# EAGLE board temp_room_module_wireless (EAGLE 6.4)
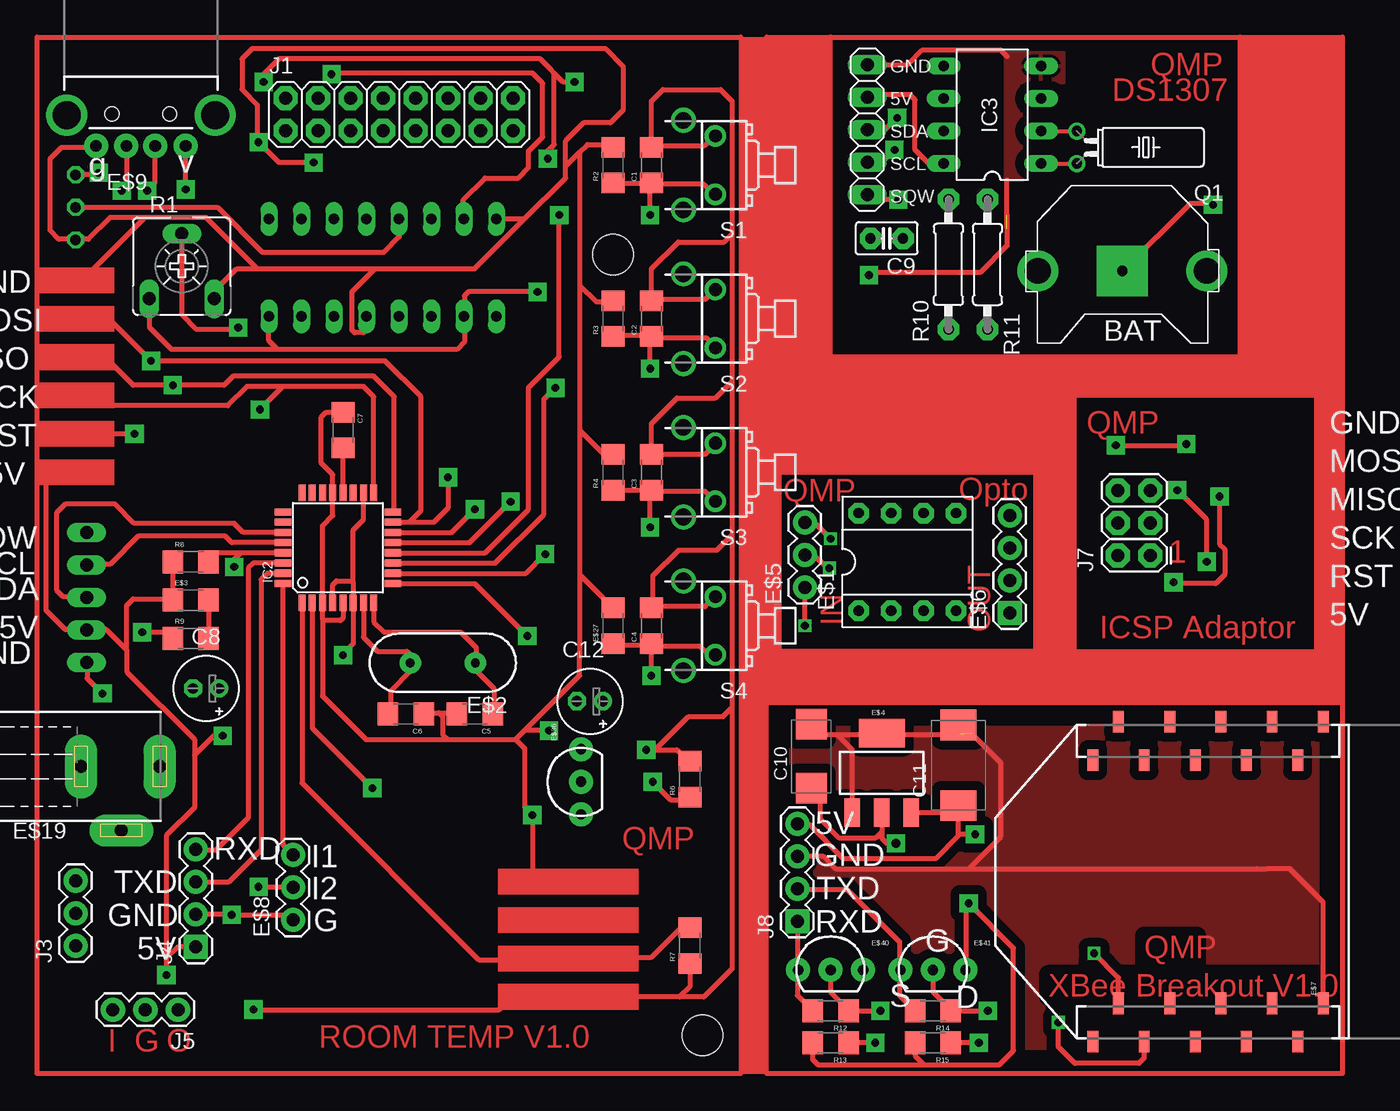
[diagram p0: board, top side]
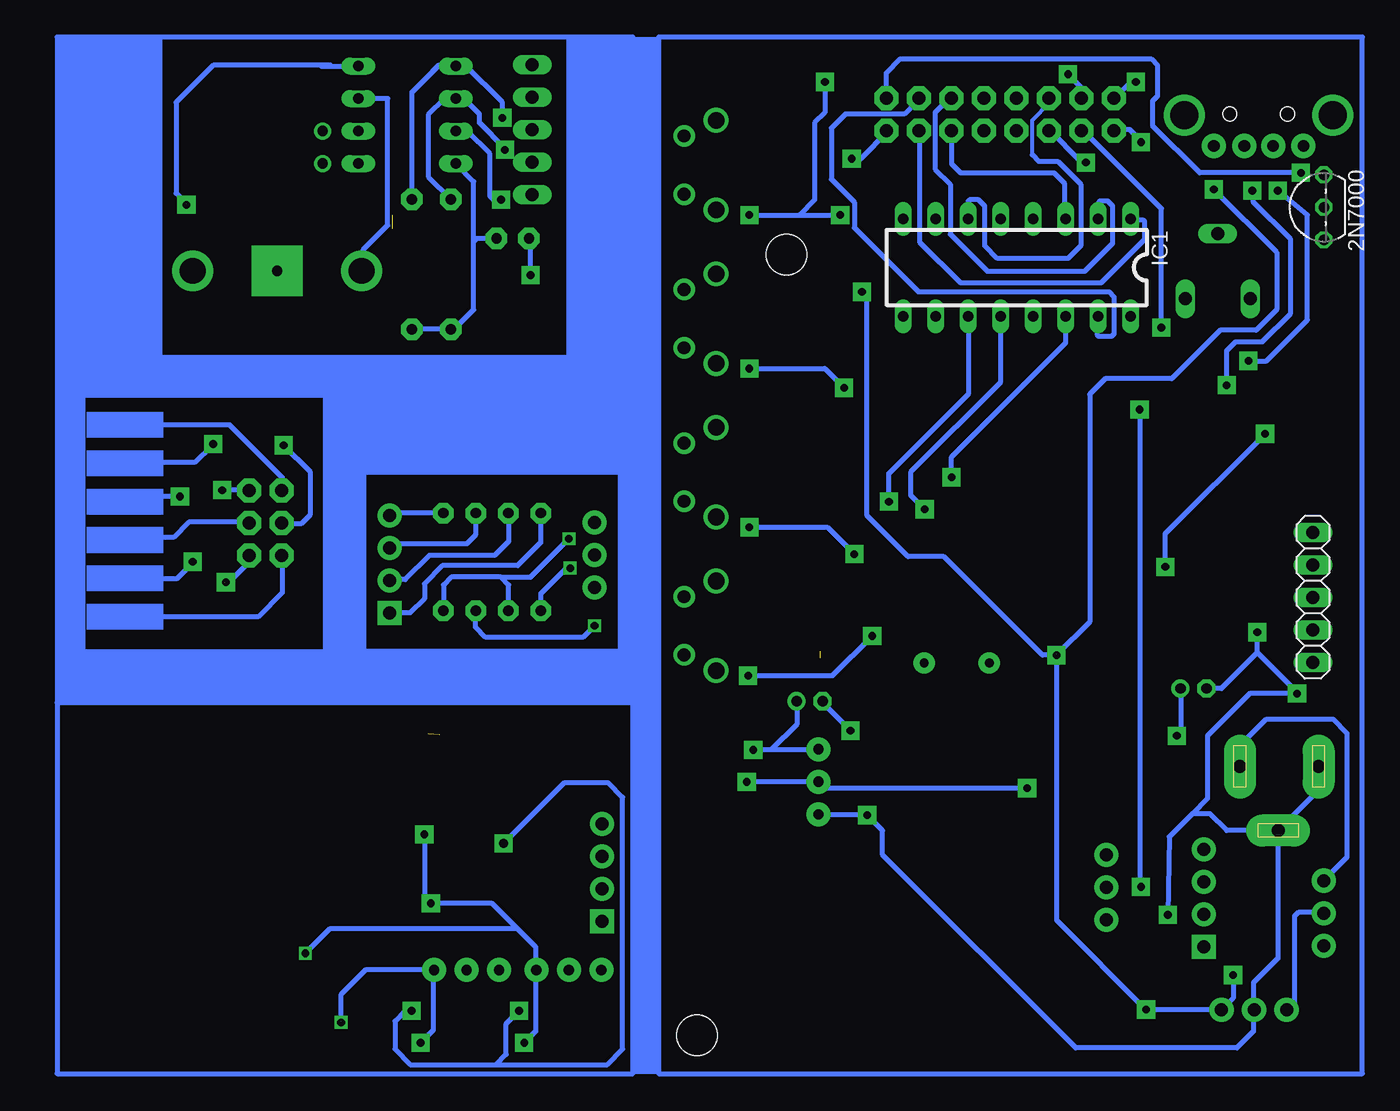
[diagram p1: board, bottom side, seen from below]

No outline drawn. Coordinates in mm, seen from the top.
Copper layers (1*16): Top 0.035mm / dielectric 1.5mm / Bottom 0.035mm
Design rules "default": minimum track width 10mil, minimum drill 24mil, track to track 28mil, track to pad 28mil, pad to pad 28mil, via to via 28mil, smd to smd 28mil, copper to edge 40mil, drill to drill 8mil, minimum pad ring 10mil, minimum via ring 8mil, stop-mask expansion 4mil, vias tented up to drill 0mil, thermal gap 10mil
Holes 3.2 mm at 45,64 52,3

## Footprints (pad centres in the part's own frame; a part is rotated, then mirrored left to right if it is on the bottom)
TO92- = drill 0.813 octagon: 1 -2.54,0; 2 0,0; 3 2.54,0
CR1220-THM = drill 2 pad 3.175: +1 -6.604,0; +2 6.604,0 | drill 0.8 pad 3.962 square: - 0,0
1206 = smd 1.6 x 1.8: 1 -1.4,0; 2 1.4,0
E2-5 = drill 0.813 pad 1.422: + -1.016,0 | drill 0.813 pad 1.422 octagon: - 1.016,0
C025-025X050 = drill 0.813 pad 1.676 octagon: 1 -1.27,0; 2 1.27,0
SMC_C = smd 2.4 x 2.4: + -2.5,0; - 2.5,0
SMC_D = smd 2.4 x 2.8: + -3.15,0; - 3.15,0
DIL08 = drill 0.813 pad 1.6 octagon: 1 -3.81,-3.81; 2 -1.27,-3.81; 3 1.27,-3.81; 4 3.81,-3.81; 5 3.81,3.81; 6 1.27,3.81; 7 -1.27,3.81; 8 -3.81,3.81
HC49US = drill 0.7 pad 1.651: 1 -2.54,0; 2 2.54,0
SOT223 = smd 1.219 x 2.235: 1 -2.311,-3.099; 2 0,-3.099; 3 2.311,-3.099 | smd 3.6 x 2.2: 4 0,3.099
1X03 = drill 1.016 pad 1.88: 1 0,0; 2 2.54,0; 3 5.08,0
1X04 = drill 1.016 pad 1.88 square: 1 0,0 | drill 1.016 pad 1.88: 2 2.54,0; 3 5.08,0; 4 7.62,0
XBEE-SMD = smd 1.7 x 0.85: 1 -12.5,20; 2 -9.5,18; 3 -12.5,16; 4 -9.5,14; 5 -12.5,12; 6 -9.5,10; 7 -12.5,8; 8 -9.5,6; 9 -12.5,4; 10 -9.5,2; 11 12.5,2; 12 9.5,4; 13 12.5,6; 14 9.5,8; 15 12.5,10; 16 9.5,12; 17 12.5,14; 18 9.5,16; 19 12.5,18; 20 9.5,20
USB-A-H = drill 0.914 pad 1.88: D+ 2.4,1.127; D- 2.4,-1.127; GND 2.4,3.5; VBUS 2.4,-3.5 | drill 2.2: GND2 0,-5.8; GND3 0,5.8 | hole 1.1: -0.1,2.25; -0.1,-2.25
733980-62 = drill 1 pad 2.5 long: 1 0,8.57; 2 0,2.42; 3 5,5.57
TO-92-AMMO = drill 0.813 pad 1.88: 1 -2.54,0; 2 0,0; 3 2.54,0
DIL16 = drill 0.813 long: 1 -8.89,-3.81; 2 -6.35,-3.81; 3 -3.81,-3.81; 4 -1.27,-3.81; 5 1.27,-3.81; 6 3.81,-3.81; 7 6.35,-3.81; 8 8.89,-3.81; 9 8.89,3.81; 10 6.35,3.81; 11 3.81,3.81; 12 1.27,3.81; 13 -1.27,3.81; 14 -3.81,3.81; 15 -6.35,3.81; 16 -8.89,3.81
TQFP32-08 = smd 1.27 x 0.559: 1 -4.293,2.8; 2 -4.293,2; 3 -4.293,1.2; 4 -4.293,0.4; 5 -4.293,-0.4; 6 -4.293,-1.2; 7 -4.293,-2; 8 -4.293,-2.8; 17 4.293,-2.8; 18 4.293,-2; 19 4.293,-1.2; 20 4.293,-0.4; 21 4.293,0.4; 22 4.293,1.2; 23 4.293,2; 24 4.293,2.8 | smd 0.559 x 1.27: 9 -2.8,-4.293; 10 -2,-4.293; 11 -1.2,-4.293; 12 -0.4,-4.293; 13 0.4,-4.293; 14 1.2,-4.293; 15 2,-4.293; 16 2.8,-4.293; 25 2.8,4.293; 26 2,4.293; 27 1.2,4.293; 28 0.4,4.293; 29 -0.4,4.293; 30 -1.2,4.293; 31 -2,4.293; 32 -2.8,4.293
DIL08' = drill 0.813 long: 1 -3.81,-3.81; 2 -1.27,-3.81; 3 1.27,-3.81; 4 3.81,-3.81; 5 3.81,3.81; 6 1.27,3.81; 7 -1.27,3.81; 8 -3.81,3.81
2X8 = drill 1.016 pad 1.88 octagon: 1 0,0; 2 0,2.54; 3 2.54,0; 4 2.54,2.54; 5 5.08,0; 6 5.08,2.54; 7 7.62,0; 8 7.62,2.54; 9 10.16,0; 10 10.16,2.54; 11 12.7,0; 12 12.7,2.54; 13 15.24,0; 14 15.24,2.54; 15 17.78,0; 16 17.78,2.54
1X05 = drill 1.016 long: 1 -5.08,0; 2 -2.54,0; 3 0,0; 4 2.54,0; 5 5.08,0
2X3 = drill 1.016 pad 1.88 octagon: 1 0,0; 2 0,2.54; 3 2.54,0; 4 2.54,2.54; 5 5.08,0; 6 5.08,2.54
TC38H = drill 0.813: 1 -1.27,0; 2 1.27,0
CA6V = drill 1.016 long: A -2.54,-2.54; E 2.54,-2.54; S 0,2.54
0207/10 = drill 0.813 pad 1.676 octagon: 1 -5.08,0; 2 5.08,0
TL1105JA = drill 1 pad 1.676: 1 -2.275,0; 2 2.275,0 | drill 1.3 pad 1.9: 3 -3.5,2.5; 4 3.5,2.5

## Placement (x,y rotation side)
2N7000  [TO92-]  3,67.7 90 bottom
BAT  CR1220  [CR1220-THM]  84.81,62.74 180 top
C1  0.1uF  [1206]  48,71 90 top
C2  0.1uF  [1206]  48,59 90 top
C3  0.1uF  [1206]  48,47 90 top
C4  0.1uF  [1206]  48,35 90 top
C5  22pF  [1206]  34.2,28.1 180 top
C6  22pF  [1206]  28.8,28.1 180 top
C7  0.1uF  [1206]  23.9,50.3 270 top
C8  [E2-5]  13.2,30.1 180 top
C9  0.1uF  [C025-025X050]  66.39,65.28 180 top
C10  [SMC_C]  60.5,24.8 90 top
C11  [SMC_D]  72,24.1 90 top
C12  [E2-5]  43.2,29.1 180 top
E$1  [DIL08]  68,40 0 top
E$2  [HC49US]  31.7,32.1 180 top
E$3  [1206]  12,37 0 top
E$4  [SOT223]  66,23.5 0 top
E$5  [1X03]  60,38 90 top
E$6  [1X04]  76,36 90 top
E$7  [XBEE-SMD]  102.5,15 90 top
E$8  [1X03]  20,12 90 top
E$9  [USB-A-H]  8.1,74.9 270 top
E$19  [733980-62]  1,24 270 top
E$27  [1206]  45,35 90 top
E$36  [TO-92-AMMO]  42.5,22.8 90 top
E$40  [TO-92-AMMO]  62,8.1 0 top
E$41  [TO-92-AMMO]  70,8.1 0 top
IC1  [DIL16]  27,63 180 bottom
IC2  [TQFP32-08]  23.5,41.1 90 top
IC3  DS1307  [DIL08']  74.64,74.93 90 top
J1  [2X8]  19.4,73.7 0 top
J2  [1X05]  3.87,37.21 270 bottom
J3  [1X03]  3,10 90 top
J4  [1X04]  12.4,9.9 90 top
J5  [1X03]  11,5 180 top
J6  [1X05]  64.87,73.79 90 top
J7  ICSP  [2X3]  87,40.5 90 top
J8  [1X04]  59.4,11.9 90 top
Q1  32.768  [TC38H]  81.25,72.39 270 top
R1  10K  [CA6V]  11.3,63.1 0 top
R2  10K  [1206]  45,71 90 top
R3  10K  [1206]  45,59 90 top
R4  10K  [1206]  45,47 90 top
R6  4.7K  [1206]  51,23 90 top
R7  10K  [1206]  51,10 90 top
R8  10K  [1206]  12,40 0 top
R9  330  [1206]  12,34 0 top
R10  2.2K  [0207/10]  71.22,63.25 90 top
R11  2.2k  [0207/10]  74.26,63.25 270 top
R12  10K  [1206]  62,4.9 180 top
R13  10K  [1206]  62,2.4 180 top
R14  10K  [1206]  70,4.9 180 top
R15  10K  [1206]  70,2.4 180 top
S1  [TL1105JA]  53,71 90 top
S2  [TL1105JA]  53,59 90 top
S3  [TL1105JA]  53,47 90 top
S4  [TL1105JA]  53,35 90 top

## Library data of the parts
2N7000 = maxim
BAT C8 C9 C12 IC3 R10 R11 = adafruit
C1-C7 E$1-E$9 E$27 E$36 E$40 E$41 IC1 J1 J3-J5 J7 J8 R2-R4 R6-R9 R12-R15 = SparkFun
C10 C11 = rcl
E$19 = con-conrad
IC2 = atmel
J2 J6 = pinhead
Q1 = crystal
R1 = pot
S1-S4 = switch

## Nets
GND: R4.2
GND1: IC3.4 J6.5
N$14: IC3.1 Q1.2
N$15: IC3.2 Q1.1
N$39: BAT.+2 IC3.3
S$2: C1.1 R2.1
S$8: C3.1
S$11: C3.2 C4.2
S$34: E$3.2
S$40: J7.1
S$44: J8.1
S$47: E$5.1
S$48: E$40.2 E$41.2
S$50: E$6.1
S$53: J4.1 J5.1
S$62: E$7.2 R13.2 R15.2
S$66: R4.1
S$69: C4.1
S$77: 2N7000.2
S$81: E$36.2
S$94: C7.1
SCL: IC3.6 R10.2
SDA: R11.1
SQW: IC3.7
VCC: C9.1 IC3.8 R10.1 R11.2

## Tracks (layer width: path | path; a pad name or v marks a point on that pad's centre or on a via)
GND  (via drill 0.6 pad 1.42)  (1 unrouted)
  Top 0.406: 42.4,72 42.4,61.6 | 42.4,61.6 42.4,50.3 | 42.4,50.3 42.4,39 | 42.4,39 44.7,36.7 | 45,60.3 43.7,60.3 42.4,61.6 | R4.2 44.3,48.4 42.4,50.3 | 42.4,72 43,72.6 45,72.6 | 42.4,39 42.4,32.5 | 25.8,59.2 25.8,58.2 25.5,57.9 24.8,57.9 24.6,58.1 24.6,61.1 26.4,62.9 | 13.8,60.5 13.8,61.1 15.6,62.9 17.2,62.9 | 17.2,62.9 26.4,62.9 | 26.4,62.9 34.2,62.9 38.1,66.8 | 17.2,62.9 13.2,66.9 8.4,66.9 | 8.4,66.9 5.7,66.9 4,65.2 1.7,65.2 1,65.9 1,71.5 1.9,72.4 4.4,72.4 4.5,72.5 | 36,66.8 38.1,66.8 | 38.1,66.8 41.3,70 41.3,70.9 | 41.3,70.9 41.3,72.9 42.7,74.3 44.8,74.3 45.8,75.3 45.8,78.7 44.4,80.1 16.8,80.1 16,79.3 16,76.9 17.2,75.7 17.2,72.9 v17.3,72.8 18.9,71.2 v21.6,71.2 | 42.4,72 41.3,70.9 | 8.4,66.9 4,62.5 | 23.9,36.8 23.9,35.6 23.7,35.4 22.4,35.4 22.3,35.5 | 22.3,35.5 22.3,36.8 | 22.3,35.5 22.3,29.5 25.7,26.1 32.1,26.1 | 30.2,28.2 31.4,28.2 | 31.4,28.2 32.8,28.2 | 31.4,28.2 31.7,27.9 31.7,26.5 32.1,26.1 | 37.4,26.1 38.1,26.8 | 38.1,26.8 42.4,31.1 42.4,33 | 32.1,26.1 37.4,26.1 | 37.4,26.1 38.1,25.4 38.1,20.8 v38.7,20.2 38.7,15.1 | v40,26.8 38.1,26.8 | 19.9,12 19.5,12.4 v15.2,12.4 15.1,12.5 12.4,12.5 | v8.2,34.5 10.1,34.5 | 3.9,32.1 3.9,30.9 v5.1,29.7
  Bottom 0.406: 42.2,29.1 42.2,29 v40,26.8 | 42.5,20.3 42.4,20.2 v38.7,20.2 37.5,19 37.5,17.1 22.4,2 9.8,2 8.5,3.3 8.5,7.1 6.6,9 6.6,19 10.6,19 11.9,20.3 13.3,20.3 | v21.6,71.2 21.9,71.2 24.5,73.8 | 13.3,20.3 14.2,19.4 15.1,18.5 v15.2,12.4 | 12.2,30.1 11,30.1 8.2,32.9 | 8.2,32.9 v8.2,34.5 | 8.2,32.9 5.1,29.8 v5.1,29.7 8.8,29.7 12.1,26.4 12.1,21.5 13.3,20.3
GND1  (via drill 0.6 pad 1.42)  (1 unrouted)
  Top 0.406: IC3.4 78.33,78.74 | J6.5 68.04,78.87 69.18,80.01 75.28,80.01 75.79,79.5 | 75.79,66.04 75.79,69.85 | 75.8,67.1 75.8,64.7 73.7,62.6 65.2,62.6 v65,62.4
  Bottom 0.406: 81.38,78.74 IC3.4 | v65,62.4 65,65.2 65.1,65.3
  pour Top: 75.66,79.76 75.66,69.85 91.92,69.85 91.92,74.93 76.68,74.93 76.68,77.47 80.23,77.47 80.23,79.76
GND3  (1 unrouted)
  Top 0.406: 59.4,17 61.4,17 62.4,16 72.8,16 | 72.8,16 75.3,18.5 75.3,24.3 73,26.6 | 72.8,16 95.3,16 96.1,16 97.9,16 100.5,13.4 100.5,5.7 | 60.4,26.5 62.5,26.5 | 62.5,26.5 72.1,26.5 | 63.7,20.6 63.7,25.3 62.5,26.5
  pour Top: 59,27 100,27 100,2 59,2
N$14
  Top 0.305: IC3.1 78.71,71.12 arc-90 78.84,70.99 arc-90 78.96,71.12 Q1.2
N$15
  Top 0.305: IC3.2 Q1.1
N$39
  Bottom 0.406: IC3.3 76.17,76.2 76.17,66.29 78.07,64.39 78.07,62.74 BAT.+2
S$1
  Bottom 0.406: 55,81 55,0 0,0 0,81 55,81
S$2
  Top 0.406: 45,69.5 R2.1 C1.1
S$3
  Bottom 0.406: 94,56 62,56 62,81 94,81 94,56
S$4
  Top 0.406: 100,53 81,53 81,33 100,33 100,53
S$5  (via drill 0.6 pad 1.42)
  Top 0.406: 27.9,43.1 29.1,43.1 | 29.1,43.1 31,43.1 32.1,44.2 v32.1,46.6 | 29.1,43.1 30,44 30,52.9 27.2,55.7 v8.9,55.7 5.4,59.2 | 7,72.5 7,69.4 v6.6,69
  Bottom 0.406: 23.2,59.2 23.2,57.1 32.1,48.2 v32.1,46.6 | v8.9,55.7 7.5,55.7 4.3,58.9 4.3,67.1 v6.6,69
S$6
  Top 0.406: 53,32.7 52.5,32.7 51.8,33.4 48.2,33.4
S$7
  Bottom 0.406: 32.1,73.7 32.1,71.1 31.4,70.4 24.1,70.4 23.3,69.6 23.3,66.9 23.2,66.8
S$8
  Top 0.406: 53,44.7 52.2,45.5 48.1,45.5 C3.1
S$9
  Top 0.406: 53,49.3 53,49.2 52.2,48.4 48.2,48.4
S$10
  Top 0.406: 53,56.7 53,56.8 52.3,57.5 48.2,57.5
S$11
  Top 0.406: 47.5,25.3 48.3,25.3 50.9,27.9 53.6,27.9 54.3,28.6 | 53,61.3 52.2,60.5 48,60.5 48,62.9 50.1,65 53.7,65 54.3,65.6 | C3.2 48,50.8 50,52.8 53,52.8 54.3,54.1 | 53,73.3 52.9,73.3 52.1,72.5 48,72.5 48,76 48.9,76.9 53.4,76.9 54.3,76 54.3,65.6 | 54.3,65.6 54.3,54.1 | 54.3,54.1 54.3,42.1 | 54.3,42.1 53.1,40.9 50.1,40.9 48.1,38.9 48.1,36.5 | 53,37.3 52.2,36.5 48.1,36.5 | 48.1,36.5 C4.2 | 54.3,42.1 54.3,28.6 | 54.3,28.6 54.3,8.2 52.1,6 50.2,6 | 50.2,6 45.9,6 | 51,8.5 51,6.8 50.2,6
S$12
  Top 0.406: 53,68.7 52.9,68.7 52.1,69.5 47.9,69.5
S$13
  Bottom 0.305: 25.8,71.8 25.8,74.5 24.4,75.9
  Bottom 0.406: 24.4,76.3 24.4,75.9 | 25.8,71.8 25.3,71.3 23.8,71.3 22,69.5 22,64.7 23,63.7 28.5,63.7 29.5,64.7 29.5,67.8 30,68.3 30.7,68.3 30.8,68.2 30.8,66.8
S$14
  Bottom 0.406: 57,29 57,0 102,0 102,29 | 102,29 57,29 | 57,29 57,81 102,81 102,29
S$15
  Bottom 0.406: 3,12.6 5,12.6 5.3,12.3 5.3,5.6 5.9,5
S$17
  Bottom 0.406: 84.4,45.5 84.4,46.6 88.5,50.7 95.5,50.7
S$18
  Top 0.406: 19.2,39.9 16.9,39.9 16.5,39.5 16.5,20 14,17.5 12.4,17.5
S$19
  Bottom 0.406: 58,33 78,33 78,47 58,47 58,33
S$21
  Top 0.406: 45,33.5 48,33.5
S$22
  Bottom 0.406: 32.1,76.3 32.2,76.3 33.4,75.1 33.4,70.7 32.2,69.5 32.2,65.6 29.3,62.7 21.7,62.7 19.5,64.9 19.5,67.8 19.9,68.2 20.5,68.2 20.6,68.1 20.6,66.8
S$23  (via drill 0.6 pad 1.42)
  Top 0.406: 27.7,40.7 35,40.7 38.4,44.1 38.4,53.6 40.8,56 v40.8,67.1
S$24
  Top 0.406: 0,81 55,81 55,0 0,0 0,81
S$25
  Top 0.406: 19.2,41.5 15.2,41.5 14.7,42 7.9,42 5.7,39.8 3.7,39.8
S$26
  Top 0.406: 19.1,42.3 16.1,42.3 15.4,43 7.6,43 6.1,44.5 2.2,44.5 1.5,43.8 1.5,37.8 2,37.3 3.8,37.3 3.9,37.2
S$27
  Top 0.406: 25.5,36.8 25.5,34.1 26.6,33 28.9,33 29.2,32.7 29.2,31.5 27.6,29.9 27.6,28.3
S$28
  Top 0.406: 26.3,36.8 26.3,35.3 27.1,34.5 33.1,34.5 34.3,33.3 34.3,31.5 35.7,30.1 35.7,28.3
S$29
  Bottom 0.406: 84.4,40.5 84.4,37.6 86.3,35.7 95.3,35.7
S$30  (via drill 0.6 pad 1.42)
  Top 0.406: 19,40.7 15.9,40.7 | 15.9,40.7 13.9,40.7 13.7,40.5 | v15.4,39.6 15.4,40.2 15.9,40.7 | v7.6,50 4.5,50
  Bottom 0.406: v15.4,39.6 15.4,42.2 v7.6,50
S$31
  Bottom 0.406: 94.9,47.8 91.2,47.8 89.9,49.1
S$32  (via drill 0.6 pad 1.42)
  Top 0.406: v84.3,49.1 89.7,49.1 v89.8,49.2
  Bottom 0.406: 84.5,43 82.9,43 82.2,43.7 82.2,47 v84.3,49.1
S$33
  Top 0.406: 10.6,39.8 10.6,37.2
S$34
  Top 0.406: E$3.2 13.4,34.2
S$35
  Top 0.406: 23.1,36.9 23.1,38.2 23.4,38.5 24.6,38.5 24.7,38.4 | 24.7,38.4 24.7,37.1 | 24.7,38.4 24.7,42.5 25.5,43.3 25.5,45.3
S$36
  Bottom 0.406: 95.3,38.7 92.6,38.7 91.4,39.9
S$37
  Top 0.406: 58,33 58,47 78,47 78,33 58,33
S$38
  Top 0.406: 68.3,20.4 71.9,20.4
S$39
  Bottom 0.406: 87,43.1 91.7,43.1 92.9,41.9 94.6,41.9
S$40  (via drill 0.6 pad 1.42)  (1 unrouted)
  Top 0.406: v92.4,45.1 92.4,41.4 92.8,41 92.8,39 92.1,38.3 89,38.3 88.9,38.4
  Bottom 0.406: 88.9,38.4 88.6,38.4 87,40 J7.1 | v92.4,45.1 95.2,45.1
S$41  (via drill 0.6)
  Top 0.406: v62,41.8 60.7,43.1 60,43.1
  Bottom 0.406: 66.7,36.2 66.7,38.2 67.3,38.8 | 67.3,38.8 71.2,38.8 71.8,38.2 71.8,36.2 | 67.3,38.8 65.1,38.8 65,38.8 v62,41.8
S$42
  Top 0.406: 57,29 102,29 | 102,29 102,27 102,0 57,0 57,29 | 57,29 57,81 102,81 102,29
S$43
  Top 0.406: 12.4,15 15,15 17.5,17.5 17.5,38.6 18,39.1 19.3,39.1
S$44
  Top 0.406: 60.3,5.2 59.4,6.1 J8.1
S$45
  Bottom 0.406: 81,53 100,53 100,33 81,33 81,53
S$46
  Top 0.406: 68.5,5 67.4,6.1 67.4,10.3 63.3,14.4 59.4,14.4
S$47  (via drill 0.6)
  Top 0.406: v60,35 E$5.1
  Bottom 0.406: v60,35 60.9,34.1 68.5,34.1 69.3,34.9 69.3,36.2
S$48  (via drill 0.6 pad 1.42, 0.7 pad 1.42)
  Top 0.406: E$41.2 70,6.4 71.5,4.9 v74.3,4.9 | E$40.2 62,6.4 63.5,4.9 v65.9,4.9 | 66,20.5 66,18.9 | 66,18.9 65.5,18.4 62.7,18.4 61.2,19.9 61.2,21.5 60.6,22.1 | 66,18.9 66,18.4 66.4,18 v67.1,18
  Bottom 0.406: v74.3,4.9 74.8,4.9 75.6,4.1 75.6,1.9 74.4,0.7 67.7,0.7 | 67.7,0.7 66.9,1.5 66.9,3.9 v65.9,4.9 | 67.7,0.7 59,0.7 57.8,1.9 57.8,21.6 58.9,22.7 62.4,22.7 v67.1,18
S$49  (via drill 0.6)
  Top 0.406: v61.9,39.5 61.7,39.5 60.7,40.5 60,40.5
  Bottom 0.406: 64.2,36.2 64.2,37.5 62.2,39.5 v61.9,39.5
S$50
  Bottom 0.406: 64.2,43.8 64.2,41.5 66,39.7 71.9,39.7 73.3,38.3 73.3,37.1 74.4,36 E$6.1
S$51
  Top 0.406: 19.2,38.3 19.2,17.9 20,17.1
S$52  (via drill 0.6 pad 1.42)
  Top 0.406: 3,70.3 4.7,70.3 v4.8,70.4
  Bottom 0.406: 37.2,76.3 37.2,78.2 36.1,79.3 16.5,79.3 16,78.8 16,76.4 16.4,76 16.4,74.1 12.7,70.4 v4.8,70.4
S$53  (via drill 0.6 pad 1.42)  (1 unrouted)
  Top 0.406: 24.7,36.9 24.7,33.6 23.9,32.8 | 7,33.1 5.4,34.7 2.2,34.7 0.7,36.2 0.7,47 | 7,33.1 7,31.4 12.3,26.1 12.3,24.9 | 12.3,24.9 12.3,20.8 10.1,18.6 10.1,9 | 10.1,9 v10.1,7.7 | 36.9,5.8 36.1,5 v16.9,5 | 7,33.1 7,36.6 7.5,37.1 10.5,37.1 | v14.5,26.4 13.8,26.4 12.3,24.9 | J4.1 11,9.9 10.1,9
  Bottom 0.406: 14.2,30.1 14.2,26.7 v14.5,26.4 | v10.1,7.7 10.1,5.9 J5.1 v16.9,5 23.9,12 23.9,32.8
S$54  (via drill 0.6 pad 1.42)
  Top 0.406: v91.4,40 91.4,43.3 v89.1,45.6
  Bottom 0.406: 87,45.6 v89.1,45.6
S$55
  Bottom 0.406: 66.7,43.8 66.7,41.6 67.8,40.5 72.9,40.5 74.8,38.6 75.9,38.6 76,38.5
S$56  (via drill 0.6 pad 1.42)
  Top 0.406: 26.3,45.6 26.3,52.9 25.5,53.7 19.2,53.7 | 19.2,53.7 v17.4,51.9 | v17.3,14.6 19.9,14.6 20,14.5 | 19.2,53.7 16.4,53.7 14.9,52.2 5.6,52.2
  Bottom 0.406: v17.4,51.9 17.4,14.7 v17.3,14.6
S$57  (via drill 0.6 pad 1.42)
  Top 0.406: 27.9,43.9 27.9,52.9 26.3,54.5 15.3,54.5 14.6,53.8 v10.6,53.8 7.5,53.8 5.3,56 | 9.2,72.5 9.2,69.6 v8.6,69
  Bottom 0.406: v10.6,53.8 10.6,56.5 9.9,57.2 7.8,57.2 5.6,59.4 5.6,65.2 8.5,68.1 8.5,68.9 v8.6,69
S$58  (via drill 0.6 pad 1.42)
  Top 0.406: v39.9,71.5 39.9,72.1 40.4,72.6 40.4,78.2 | 40.4,78.2 40.2,78.4 39.3,79.3 18.9,79.3 17.7,78.1 v17.7,77.5 | v42,77.5 41.1,77.5 40.4,78.2 | v47.9,67.1 47.9,69.6 48,69.7
  Bottom 0.406: 37.1,73.7 37.1,73.6 39.2,71.5 v39.9,71.5 | v17.7,77.5 18.1,77.5 19.4,76.2 | v42,77.5 42,75.1 42.8,74.3 42.8,68.3 44,67.1 | v47.9,67.1 44,67.1 | 44,67.1 40.9,67.1 40.8,67.2
S$59
  Bottom 0.406: 69.3,43.8 69.3,42.1 70,41.4 75.7,41.4 76,41.1
S$60  (via drill 0.6 pad 1.42)
  other vias: 88.8,38.4
S$61
  Top 0.406: 62,81 94,81 94,56 62,56 62,81
S$62  (via drill 0.6, 0.6 pad 1.42)
  Top 0.406: 59.4,19.5 60.3,19.5 63,16.8 70.2,16.8 72,18.6 | 72,18.6 72,20.7 | v73.3,18.7 72.1,18.7 72,18.6 | R13.2 60.6,1.1 61,0.7 69.3,0.7 | 69.3,0.7 75.2,0.7 76.3,1.8 76.3,9.8 v72.8,13.3 72.6,13.1 72.6,8.1 | v65.5,2.4 63.6,2.4 | R15.2 68.6,1.4 69.3,0.7 | E$7.2 84.5,7.5 v82.6,9.4
  Bottom 0.406: 66,11.3 64.6,9.9 64.6,3.3 v65.5,2.4 | 66,11.3 80.7,11.3 v82.6,9.4 | 72.7,13.3 68,13.3 66,11.3 | 72.7,13.3 v72.8,13.3 | v73.3,18.7 73.3,13.9 72.7,13.3
S$63  (via drill 0.6 pad 1.42)
  other vias: 91.9,67.9
S$64  (1 unrouted)
  Top 0.406: 91.9,68 90.1,68 84.8,62.7
  Bottom 0.406: 80.6,78.8 89.8,78.8 92.7,75.9 92.7,68.8 91.9,68
S$65
  Bottom 0.406: 71.8,43.8 75.8,43.8 76,43.6
S$66  (via drill 0.6 pad 1.42)
  Top 0.406: R4.1 47.9,45.6 | 47.9,45.6 48,45.7 | v47.9,42.7 47.9,45.6 | 27.8,39.1 38.2,39.1 v39.7,40.6
  Bottom 0.406: v47.9,42.7 41.8,42.7 v39.7,40.6
S$67
  Top 0.406: 70.8,71.2 69.6,71.2 68.6,72.2 68.6,76.1 68.2,76.5 65.1,76.5 64.9,76.3
S$68  (via drill 0.6)
  other vias: 79.8,4
S$69  (via drill 0.6 pad 1.42)
  Top 0.406: v48,31.1 C4.1 | 27.7,38.3 34.2,38.3 v38.3,34.2
  Bottom 0.406: v48,31.1 41.4,31.1 v38.3,34.2
S$71  (via drill 0.6 pad 1.42)
  Top 0.406: 45,57.7 48,57.7 47.9,57.6 v47.9,55.1 | 27.9,39.9 35.8,39.9 39.6,43.7 39.6,52.7 v40.5,53.6
  Bottom 0.406: v47.9,55.1 42,55.1 v40.5,53.6
S$72  (via drill 0.6 pad 1.42)
  Top 0.406: 27.7,42.3 32.4,42.3 v34.2,44.1
  Bottom 0.406: 28.3,59.2 28.3,54 35.3,47 35.3,45.2 v34.2,44.1
S$73
  Bottom 0.406: 34.6,73.8 34.6,65 31.4,61.8 20.4,61.8 17,65.2 17,66.6 17.1,66.7 18,66.7 18.1,66.8
S$74  (via drill 0.6 pad 1.42)
  Top 0.406: 27.9,41.5 33.8,41.5 v37,44.7
  Bottom 0.406: 30.8,59 30.8,53.1 36.3,47.6 36.5,47.4 37,46.9 v37,44.7
S$75
  Bottom 0.406: 6.7,18.9 4,21.6 3.4,22.2 3.4,24
S$76
  Bottom 0.406: 34.7,76.3 34.7,76.1 35.8,75 40.4,75 41.5,73.9 41.5,69.9 39.7,68.1 39.7,66.1 34.7,61.1 19.8,61.1 19.4,60.7 19.4,57.8 19.6,57.6 20.6,57.6 20.7,57.7 20.7,59.2
S$77
  Top 0.406: 2N7000.2 14.1,67.7 17.6,64.2 27.1,64.2 28.3,65.4 28.3,66.8
S$78  (via drill 0.6 pad 1.42)  (1 unrouted)
  Top 0.406: 86.5,2.3 86.5,1.2 86.1,0.8 81.1,0.8 79.8,2.1 79.8,4.1 | v73.6,2.4 71.5,2.4
  Bottom 0.406: v73.6,2.4 72.6,3.4 72.6,8.1 77.9,8.1 79.8,6.2 79.8,4.1
S$79
  Top 0.406: 20.7,36.8 20.7,22.7 34.5,8.9 37.9,8.9 38,8.8
S$80  (via drill 0.6 pad 1.42)
  Top 0.406: 21.5,37 21.5,27 v26.2,22.3
  Bottom 0.406: v26.2,22.3 41.9,22.3 42.4,22.8
S$81  (via drill 0.6 pad 1.42)
  Top 0.406: v48.1,22.8 49.5,21.4 50.6,21.4 50.7,21.5
  Bottom 0.406: E$36.2 v48.1,22.8
S$82  (via drill 0.6 pad 1.42)
  Top 0.406: v39.1,61.1 33.7,61.1 33.4,60.8 33.4,57.2 32.8,56.6 18.8,56.6 | 18.8,56.6 18.1,57.3 18.1,59.2 | 18.8,56.6 10.5,56.6 8.8,58.3 8.8,60.6 | v11.6,69.1 11.6,72.6
  Bottom 0.406: v39.1,61.1 38.7,60.7 38.7,43.6 35.5,40.4 32.7,40.4 25,32.7 v23.9,32.7 21.3,35.3 21.3,53.1 20.1,54.3 14.9,54.3 11.1,58.1 8.3,58.1 6.7,59.7 6.7,64.2 v11.6,69.1
S$83
  Top 0.406: 22.3,37 22.3,42.8 23.1,43.6 23.1,45.2
S$84  (via drill 0.6 pad 1.42)
  Bottom 0.406: v15.7,58.3 15.7,67.6 21.9,73.8
S$85  (via drill 0.6 pad 1.42)
  Top 0.406: 64.9,73.8 66.3,73.8 v67.2,74.7
  Bottom 0.406: v67.2,74.7 67.2,75.9 70.1,78.8 70.5,78.8 70.9,78.8 72.2,78.8 72.7,78.3
S$86
  Top 0.406: 11.3,65.6 11.3,59.3 12.4,58.2 15.5,58.2 15.6,58.3
S$87  (via drill 0.6 pad 1.42)
  Top 0.406: 33.3,66.8 33.3,68.3 35,70 37.6,70 38.4,70.8 38.4,72.1 39.5,73.2 39.5,77.4 38.7,78.2 23.1,78.2 v23,78.1
  Bottom 0.406: 22,76.3 22,77.1 v23,78.1
S$88
  Bottom 0.406: 19.4,73.8 18.2,73.8 17.2,72.8
S$89
  Bottom 0.406: 9.6,24 9.6,25.6 7.5,27.7 2.3,27.7 1.2,26.6 1.2,16.9 3,15.1
S$90
  Top 0.406: 45.7,9.1 48,9.1 50.5,11.6
S$92  (via drill 0.6 pad 1.42)
  Top 0.406: 50.6,24.7 50,25.3 v47.6,25.3
  Bottom 0.406: 42.5,25.3 46.2,25.3 | 46.2,25.3 v47.6,25.3 | 44.2,29.1 44.2,27.3 46.2,25.3
S$93
  Top 0.406: 23.9,45.5 23.9,48.8
S$94
  Top 0.406: 23.1,45.6 23.1,46.8 22.2,47.7 22.2,51.3 22.6,51.7 C7.1
S$95  (via drill 0.6 pad 1.42)
  Top 0.406: v67.3,68.3 65.3,68.3 64.9,68.7
  Bottom 0.406: v67.3,68.3 67.9,68.3 68,68.4
S$96
  Top 0.406: 5.3,53.7 5.2,53.6
SCL  (via drill 0.6 pad 1.42)
  Top 0.406: 64.9,71.3 66.1,71.3 v67,72.2
  Bottom 0.406: R10.2 72.99,70.1 72.99,74.93 71.72,76.2 IC3.6 | IC3.6 70.71,76.2 | 70.83,76.33 70.96,76.45 | 70.83,76.33 IC3.6 | 70.83,76.33 70.45,75.95 69.95,75.95 69,75 69,74.3 67,72.3 v67,72.2
SDA
  Bottom 0.406: R11.1 74.26,76.71 72.23,78.74
SQW
  Bottom 0.406: IC3.7 69.95,73.66 68.17,71.88 68.17,68.58 67.91,68.33
VCC
  Top 0.406: IC3.8 70.45,71.12
  Bottom 0.406: IC3.8 69.44,69.72 69.44,65.02 | 69.44,65.02 69.44,59.69 70.96,58.17 R10.1 R11.2 | C9.1 69.18,65.28 69.44,65.02
(copper drawn outside any net)
  shapes: Bottom area x16, Top area x20

## Text on the board
Top: QMP | DS1307 | QMP | QMP | Opto | 1 | IN | OUT | ICSP Adaptor | QMP | QMP | XBee Breakout V1.0 | I | G | O | ROOM TEMP V1.0
tPlace: GND | 5V | SDA | SCL | SQW
tNames: g | v | GND | MOSI | MISO | SCK | GND | RST | MOSI | 5V | MISO | SQW | SCK | SCL | RST | SDA | 5V | 5V | GND | 5V | RXD | I1 | GND | TXD | I2 | TXD | GND | G | RXD | G | 5V | S | D